# Altium PCB M2 Breakin.PcbDoc
Units mil, origin at the board's own origin, x right, y up, seen from the top; angles counter-clockwise.
Board outline 1003.97 x 2303.97 mil, 2 copper layers (Top Layer, Bottom Layer); 2 components, 49 nets, 136 pads, 34 vias.
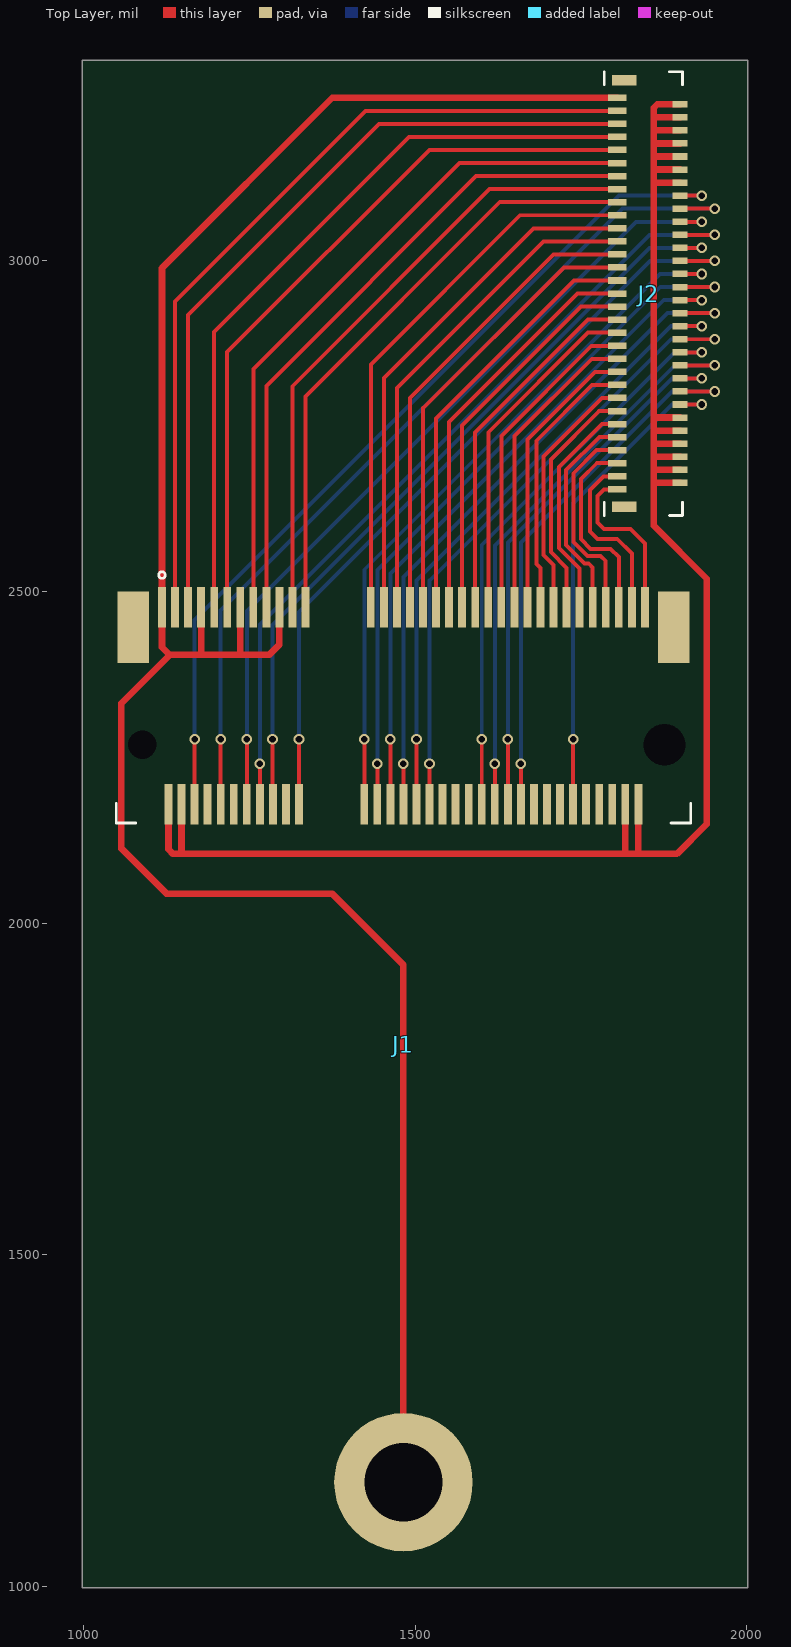
[diagram p0: Top Layer view]
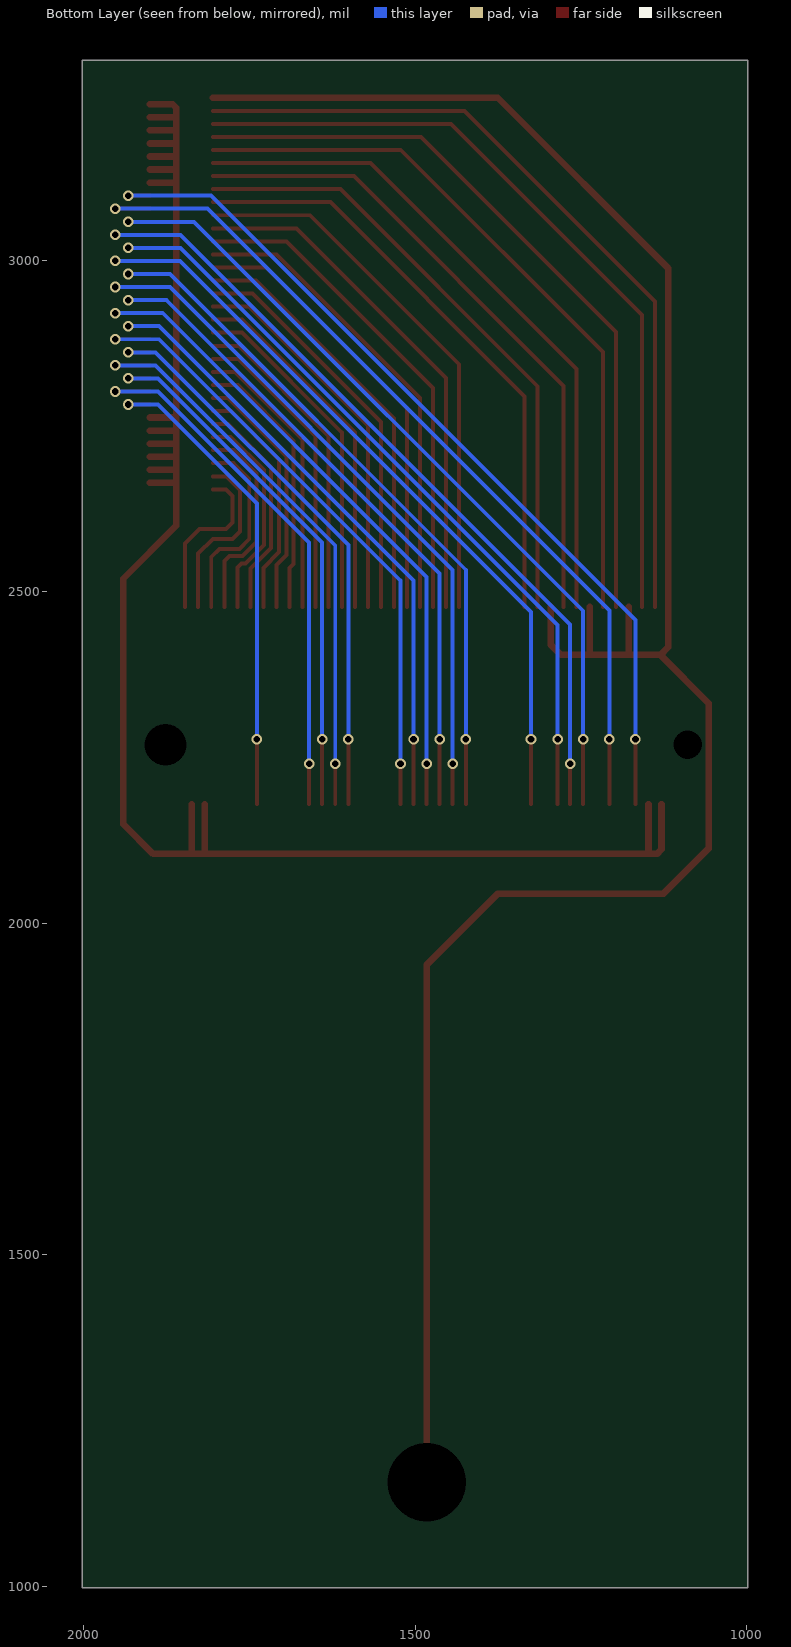
[diagram p1: Bottom Layer view, seen from below]

## Layer stack, top to bottom
Top Solder: solder mask 0.4, Solder Resist, Dk 3.5
Top Layer: signal copper 1.4
Dielectric 1: dielectric 12.6, FR-4, Dk 4.8
Bottom Layer: signal copper 1.4
Bottom Solder: solder mask 0.4, Solder Resist, Dk 3.5

## Board outline
1000,998.02 cw(c1000,1000) 998.02,1000 998.02,3300 cw(c1000,3300) 1000,3301.98 2000,3301.98 cw(c2000,3300) 2001.98,3300 2001.98,1000 cw(c2000,1000) 2000,998.02

## Design rules (kind name [scope] priority, off if disabled: settings)
Clearance [All] p1: gap=5 ignorepadtopadclearanceinfootprint=FALSE except(0: Arc-Hole Track-Hole SMDPad-Hole THPad-Hole Via-Hole Fill-Hole Poly-Hole Region-Hole Text-Hole)
PolygonConnect [All] p1: connectstyle=Relief reliefconductorwidth=10 reliefentries=4 polygonreliefangle="90 Angle" airgapwidth=10
RoomDefinition "M2 Breakout" [InComponentClass('M2 Breakout')] p1: confinementstyle=ConfineIn formatcopy=TRUE lockcomponents=FALSE outline 0,0 7630,0 7630,5450 0,5450
RoutingVias [All] p1: holewidth=10 width=16 viastyle="Through Hole" minholewidth=8 minwidth=12 maxholewidth=16 maxwidth=20
SolderMaskExpansion [All] p1: expansion=4
Width [All] p1: maxlimit=10 minlimit=5 preferedwidth=6 minimp=50.000000 maximp=50.000000 favimp=50.000000
30 further rules are at their usual default settings.

## Components (designator, comment, footprint, x,y, rotation, side; value= is the part's Value field where it differs from the comment)
J1 "MDT275E01001" MDT275E01001 1482.52,2269.57 r0 top
J2 "5020786162" 5020786162 1805,2950 r270 top

## Footprints (in the part's own frame and the unit in brackets; to place one, negate y for a bottom-side part, rotate by r counter-clockwise, add the part's x,y. Pads: shape width x height; smd on the part's side, far side on the other; paste and mask are expansions set on the pad)
5020786162 [mm] "Conn FPC Connector SKT 61 POS 0.25mm Solder RA SMD T/R"
  rect 0.25x0.72 smd: 1(7.5,0) 3(7,0) 5(6.5,0) 7(6,0) 9(5.5,0) 11(5,0) 13(4.5,0) 15(4,0) 17(3.5,0) 19(3,0) 21(2.5,0) 23(2,0) 25(1.5,0) 27(1,0) 29(0.5,0) 31(0,0) 33(-0.5,0) 35(-1,0) 37(-1.5,0) 39(-2,0) 41(-2.5,0) 43(-3,0) 45(-3.5,0) 47(-4,0) 49(-4.5,0) 51(-5,0) 53(-5.5,0) 55(-6,0) 57(-6.5,0) 59(-7,0) 61(-7.5,0)
  rect 0.25x0.57 smd: 2(7.25,2.405) 4(6.75,2.405) 6(6.25,2.405) 8(5.75,2.405) 10(5.25,2.405) 12(4.75,2.405) 14(4.25,2.405) 16(3.75,2.405) 18(3.25,2.405) 20(2.75,2.405) 22(2.25,2.405) 24(1.75,2.405) 26(1.25,2.405) 28(0.75,2.405) 30(0.25,2.405) 32(-0.25,2.405) 34(-0.75,2.405) 36(-1.25,2.405) 38(-1.75,2.405) 40(-2.25,2.405) 42(-2.75,2.405) 44(-3.25,2.405) 46(-3.75,2.405) 48(-4.25,2.405) 50(-4.75,2.405) 52(-5.25,2.405) 54(-5.75,2.405) 56(-6.25,2.405) 58(-6.75,2.405) 60(-7.25,2.405)
  rect 0.4x0.95 smd: 62(8.17,0.265) 63(-8.17,0.265)
  silkscreen extent -8.5,-0.5 8.5,2.5, body extent -8.5,-0.45 8.5,2.53, height 0.99
MDT275E01001 [mm] "CONN M.2 E FMALE 67POS 0.020 GOLD"
  rect 0.3x1.55 smd: 1(-9.25,5.275) 2(-9,-2.275) 3(-8.75,5.275) 4(-8.5,-2.275) 5(-8.25,5.275) 6(-8,-2.275) 7(-7.75,5.275) 8(-7.5,-2.275) 9(-7.25,5.275) 10(-7,-2.275) 11(-6.75,5.275) 12(-6.5,-2.275) 13(-6.25,5.275) 14(-6,-2.275) 15(-5.75,5.275) 16(-5.5,-2.275) 17(-5.25,5.275) 18(-5,-2.275) 19(-4.75,5.275) 20(-4.5,-2.275) 21(-4.25,5.275) 22(-4,-2.275) 23(-3.75,5.275) 32(-1.5,-2.275) 33(-1.25,5.275) 34(-1,-2.275) 35(-0.75,5.275) 36(-0.5,-2.275) 37(-0.25,5.275) 38(0,-2.275) 39(0.25,5.275) 40(0.5,-2.275) 41(0.75,5.275) 42(1,-2.275) 43(1.25,5.275) 44(1.5,-2.275) 45(1.75,5.275) 46(2,-2.275) 47(2.25,5.275) 48(2.5,-2.275) 49(2.75,5.275) 50(3,-2.275) 51(3.25,5.275) 52(3.5,-2.275) 53(3.75,5.275) 54(4,-2.275) 55(4.25,5.275) 56(4.5,-2.275) 57(4.75,5.275) 58(5,-2.275) 59(5.25,5.275) 60(5.5,-2.275) 61(5.75,5.275) 62(6,-2.275) 63(6.25,5.275) 64(6.5,-2.275) 65(6.75,5.275) 66(7,-2.275) 67(7.25,5.275) 68(7.5,-2.275) 69(7.75,5.275) 70(8,-2.275) 71(8.25,5.275) 72(8.5,-2.275) 73(8.75,5.275) 74(9,-2.275) 75(9.25,5.275)
  rect 1.2x2.75 smd: 76(10.35,4.5) 77(-10.35,4.5)
  round 0 hole 1.1 unplated: 77(-10,0)
  round 0 hole 1.6 unplated: 77(10,0)
  round 0 hole 3 unplated: 78(0,-28.25)
  round 5.3 smd paste-2.65: 79(0,-28.25)
  silkscreen extent -11,-3 11,6.62, body extent -11,-2.85 11,5.7, height 2.7

## Part data
J1: "CONN M.2 E FMALE 67POS 0.020 GOLD"
J2: "Conn FPC Connector SKT 61 POS 0.25mm Solder RA SMD T/R"

## Via types
v1: diameter 16, hole 10, Top Layer to Bottom Layer, 34 vias

## Nets (pads, with @x,y where several pads share a name; then routed paths per layer and width w, separated by ;. In a path a pad name is that pad's centre, name@x,y a point inside that pad or via, vN(x,y) a via of type N, cw(c..) or ccw(c..) an arc to the next point about the centre after c; other vN are vias at no path point)
3V3: J1.2 J1.4 J1.72 J1.74 J2.2 J2.4 J2.6 J2.8 J2.10 J2.12 J2.48 J2.50 J2.52 J2.54 J2.56 J2.58 J2.60 | length 2769.7
  Top Layer w10: J1.2 1128.19,2111.81 1135,2105 1150,2105 ; J1.4 1147.87,2107.13 1150,2105 ; J1.72 1817.17,2107.83 1820,2105 ; J1.74 1836.85,2106.85 1835,2105 ; J2.2 1860.43,2664.57 1860,2665 ; J2.4 1860.75,2684.25 1860,2685 ; J2.6 1861.06,2703.94 1860,2705 ; J2.8 1861.38,2723.62 1860,2725 ; J2.10 1863.31,2743.31 1860,2740 ; J2.12 1862.01,2762.99 1860,2765 ; J2.48 1862.68,3117.32 1860,3120 ; J2.50 1862.99,3137.01 1860,3140 ; J2.52 1861.69,3156.69 1860,3155 ; J2.54 1861.38,3176.38 1860,3175 ; J2.56 1861.06,3196.06 1860,3195 ; J2.58 1863.25,3215.75 1860,3212.5 ; J2.60 1865.43,3235.43 1860,3230 1860,3212.5 ; 1150,2105 1820,2105 ; 1820,2105 1835,2105 ; 1835,2105 1895,2105 1940,2150 1940,2520 1860,2600 1860,2665 ; 1860,2665 1860,2685 ; 1860,2685 1860,2705 ; 1860,2705 1860,2725 ; 1860,2725 1860,2740 ; 1860,2740 1860,2765 ; 1860,2765 1860,3120 ; 1860,3120 1860,3140 ; 1860,3140 1860,3155 ; 1860,3155 1860,3175 ; 1860,3175 1860,3195 ; 1860,3195 1860,3212.5
6: J1.6 J2.46 | length 1340.7
  Top Layer w6: J1.6 v1(1167.56,2277.56) ; J2.46 v1(1932.64,3097.64)
  Bottom Layer w6: v1(1167.56,2277.56) 1167.56,2457.56 1807.64,3097.64 v1(1932.64,3097.64)
10: J1.10 J2.44 | length 1340.4
  Top Layer w6: J1.10 v1(1206.93,2277.56) ; J2.44 v1(1952.05,3077.95)
  Bottom Layer w6: v1(1206.93,2277.56) 1206.93,2471.93 1812.95,3077.95 v1(1952.05,3077.95)
14: J1.14 J2.42 | length 1253.7
  Top Layer w6: J1.14 v1(1246.3,2277.56) ; J2.42 v1(1932.64,3058.27)
  Bottom Layer w6: v1(1246.3,2277.56) 1246.3,2471.3 1833.27,3058.27 v1(1932.64,3058.27)
16: J1.16 J2.40 | length 1252.8
  Top Layer w6: J1.16 v1(1265.98,2240.98) ; J2.40 v1(1952.05,3038.58)
  Bottom Layer w6: v1(1265.98,2240.98) 1265.98,2450.98 1853.58,3038.58 v1(1952.05,3038.58)
18: J1.18 J2.38 | length 1186.2
  Top Layer w6: J1.18@1285,2180 v1(1285,2277.56) ; J2.38 v1(1932.64,3018.9)
  Bottom Layer w6: v1(1285,2277.56) 1285,2450 1853.9,3018.9 v1(1932.64,3018.9)
22: J1.22 J2.36 | length 1188.6
  Top Layer w6: J1.22 v1(1325.04,2277.56) ; J2.36 v1(1952.05,2999.21)
  Bottom Layer w6: v1(1325.04,2277.56) 1325.04,2470.04 1854.21,2999.21 v1(1952.05,2999.21)
32: J1.32 J2.34 | length 1080.4
  Top Layer w6: J1.32 v1(1423.46,2277.56) ; J2.34 v1(1932.64,2979.53)
  Bottom Layer w6: v1(1423.46,2277.56) 1423.46,2533.46 1869.53,2979.53 v1(1932.64,2979.53)
34: J1.34 J2.32 | length 1091.2
  Top Layer w6: J1.34 v1(1443.15,2240.98) ; J2.32 v1(1952.05,2959.84)
  Bottom Layer w6: v1(1443.15,2240.98) 1443.15,2533.15 1869.84,2959.84 v1(1952.05,2959.84)
36: J1.36 J2.30 | length 1021.4
  Top Layer w6: J1.36 v1(1462.83,2277.56) ; J2.30 v1(1932.64,2940.16)
  Bottom Layer w6: v1(1462.83,2277.56) 1462.83,2527.83 1875.16,2940.16 v1(1932.64,2940.16)
38: J1.38 J2.28 | length 1029.2
  Top Layer w6: J1.38 v1(1482.52,2240.98) ; J2.28 v1(1952.05,2920.47)
  Bottom Layer w6: v1(1482.52,2240.98) 1482.52,2522.52 1880.47,2920.47 v1(1952.05,2920.47)
40: J1.40 J2.26 | length 959.5
  Top Layer w6: J1.40 v1(1502.2,2277.56) ; J2.26 v1(1932.64,2900.79)
  Bottom Layer w6: v1(1502.2,2277.56) 1502.2,2517.2 1885.79,2900.79 v1(1932.64,2900.79)
42: J1.42 J2.24 | length 970.3
  Top Layer w6: J1.42 v1(1521.89,2240.98) ; J2.24 v1(1952.05,2881.1)
  Bottom Layer w6: v1(1521.89,2240.98) 1521.89,2516.89 1886.1,2881.1 v1(1952.05,2881.1)
50: J1.50 J2.22 | length 876
  Top Layer w6: J1.50 v1(1600.63,2277.56) ; J2.22 v1(1932.64,2861.42)
  Bottom Layer w6: v1(1600.63,2277.56) 1600.63,2570.63 1891.42,2861.42 v1(1932.64,2861.42)
52: J1.52 J2.20 | length 886.8
  Top Layer w6: J1.52 v1(1620.32,2240.98) ; J2.20 v1(1952.05,2841.73)
  Bottom Layer w6: v1(1620.32,2240.98) 1620.32,2570.32 1891.73,2841.73 v1(1952.05,2841.73)
54: J1.54 J2.18 | length 822.6
  Top Layer w6: J1.54 v1(1640,2277.56) ; J2.18 v1(1932.64,2822.05)
  Bottom Layer w6: v1(1640,2277.56) 1640,2574.44 1887.6,2822.05 v1(1932.64,2822.05)
56: J1.56 J2.16 | length 833.7
  Top Layer w6: J1.56 v1(1659.69,2240.98) ; J2.16 v1(1952.05,2802.36)
  Bottom Layer w6: v1(1659.69,2240.98) 1659.69,2574.69 1887.36,2802.36 v1(1952.05,2802.36)
64: J1.64 J2.14 | length 742.4
  Top Layer w6: J1.64 v1(1738.43,2277.56) ; J2.14 v1(1932.64,2782.68)
  Bottom Layer w6: v1(1738.43,2277.56) 1738.43,2633.43 1887.68,2782.68 v1(1932.64,2782.68)
GND: J1.1 J1.7 J1.13 J1.19 J1.78 J2.61 | length 3356.4
  Top Layer w10: J1.7 1177.4,2407.4 1175,2405 ; J1.13 1236.46,2406.46 1235,2405 ; J1.19 1295.51,2420.51 1280,2405 1235,2405 ; J1.78 1482.52,1937.48 1375,2045 1125,2045 1057.17,2112.83 1057.17,2332.17 1130,2405 ; J2.61 1375.28,3245.28 1118.35,2988.35 J1.1 1118.35,2416.65 1130,2405 ; 1130,2405 1175,2405 ; 1175,2405 1235,2405
NetJ1_3: J1.3 J2.59 | length 1246.9
  Top Layer w6: J1.3 1138.03,2938.03 1425.59,3225.59 J2.59
NetJ1_5: J1.5 J2.57 | length 1207.1
  Top Layer w6: J1.5 1157.72,2917.72 1445.91,3205.91 J2.57
NetJ1_9: J1.9 J2.55 | length 1144.6
  Top Layer w6: J1.9 1197.09,2892.09 1491.22,3186.22 J2.55
NetJ1_11: J1.11 J2.53 | length 1099
  Top Layer w6: J1.11 1216.77,2861.77 1521.54,3166.54 J2.53
NetJ1_15: J1.15 J2.51 | length 1036.5
  Top Layer w6: J1.15 1256.14,2836.14 1566.85,3146.85 J2.51
NetJ1_17: J1.17 J2.49 | length 993.8
  Top Layer w6: J1.17 1275.83,2810.83 1592.17,3127.17 J2.49
NetJ1_21: J1.21 J2.47 | length 945.9
  Top Layer w6: J1.21 1315.2,2810.2 1612.48,3107.48 J2.47
NetJ1_23: J1.23 J2.45 | length 909.1
  Top Layer w6: J1.23 1334.88,2794.88 1627.8,3087.8 J2.45
NetJ1_33: J1.33 J2.43 | length 830.9
  Top Layer w6: J1.33 1433.31,2843.31 1658.11,3068.11 J2.43
NetJ1_35: J1.35 J2.41 | length 791.1
  Top Layer w6: J1.35 1452.99,2822.99 1678.43,3048.43 J2.41
NetJ1_37: J1.37 J2.39 | length 754.3
  Top Layer w6: J1.37 1472.68,2807.68 1693.74,3028.74 J2.39
NetJ1_39: J1.39 J2.37 | length 717.5
  Top Layer w6: J1.39 1492.36,2792.36 1709.06,3009.06 J2.37
NetJ1_41: J1.41 J2.35 | length 680.7
  Top Layer w6: J1.41 1512.05,2777.05 1724.37,2989.37 J2.35
NetJ1_43: J1.43 J2.33 | length 643.9
  Top Layer w6: J1.43 1531.73,2761.73 1739.69,2969.69 J2.33
NetJ1_45: J1.45 J2.31 | length 612.9
  Top Layer w6: J1.45 1551.42,2756.42 1745,2950 J2.31
NetJ1_47: J1.47 J2.29 | length 582
  Top Layer w6: J1.47 1571.1,2751.1 1750.32,2930.32 J2.29
NetJ1_49: J1.49 J2.27 | length 548.1
  Top Layer w6: J1.49 1590.79,2740.79 1760.63,2910.63 J2.27
NetJ1_51: J1.51 J2.25 | length 520.1
  Top Layer w6: J1.51 1610.47,2740.47 1760.94,2890.94 J2.25
NetJ1_53: J1.53 J2.23 | length 489.1
  Top Layer w6: J1.53 1630.16,2735.16 1766.26,2871.26 J2.23
NetJ1_55: J1.55 J2.21 | length 461.1
  Top Layer w6: J1.55 1649.84,2734.84 1766.57,2851.57 J2.21
NetJ1_57: J1.57 J2.19 | length 430.5
  Top Layer w6: J1.57 1669.53,2730.08 1771.33,2831.89 J2.19
NetJ1_59: J1.59 J2.17 | length 410.2
  Top Layer w6: J1.59 1689.21,2535.79 1683,2542 1683,2728 1767.2,2812.2 J2.17
NetJ1_61: J1.61 J2.15 | length 380.9
  Top Layer w6: J1.61 1708.9,2540.55 1694,2555.44 1694,2704.56 1781.96,2792.52 J2.15
NetJ1_63: J1.63 J2.13 | length 362.7
  Top Layer w6: J1.63 1728.58,2536.42 1705,2560 1705,2700 1777.83,2772.83 J2.13
NetJ1_65: J1.65 J2.11 | length 338.8
  Top Layer w6: J1.65 1748.27,2535.06 1717,2566.33 1717,2688.11 1782.04,2753.15 J2.11
NetJ1_67: J1.67 J2.9 | length 324.1
  Top Layer w6: J1.67 1767.95,2537.05 1762,2543 1755.89,2543 1728,2570.89 1728,2683.56 1777.91,2733.46 J2.9
NetJ1_69: J1.69 J2.7 | length 313.8
  Top Layer w6: J1.69 1787.64,2546.36 1780,2554 1760.44,2554 1739,2575.44 1739,2679 1773.78,2713.78 J2.7
NetJ1_71: J1.71 J2.5 | length 299.1
  Top Layer w6: J2.5 1774.09,2694.09 1750,2670 1750,2580 1765,2565 1795,2565 1807.32,2552.68 J1.71
NetJ1_73: J1.73 J2.3 | length 269.9
  Top Layer w6: J2.3 1784.41,2674.41 1764,2654 1764,2591 1775,2580 1805,2580 1827.01,2557.99 J1.73
NetJ1_75: J1.75 J2.1 | length 254.9
  Top Layer w6: J2.1 1784.72,2654.72 1775,2645 1775,2605 1785,2595 1825,2595 1846.69,2573.31 J1.75
pads on no net: J1.8 J1.12 J1.20 J1.44 J1.46 J1.48 J1.58 J1.60 J1.62 J1.66 J1.68 J1.70 J1.76 J1.77 J1.79 J2.62 J2.63

## Silkscreen, mask and mechanical layers (free items; w line width, h text height)
Mechanical 1:
  lines w3.94: 1990,1000 2000,1000 ; 2000,1000 2000,3300 1000,3300 1000,1000 2000,1000

## Text inside footprints (layer, text, board x,y; h text height)
J1: Mechanical 1 "2230" at 1049.45,1157.36 h40; Mechanical 1 "Wurth / 9774020243R" at 1600.63,1167.2 h19.68